# Altium PCB PCB_TX_V1.PcbDoc
Units mm, origin at the board's own origin, x right, y up, seen from the top; angles counter-clockwise.
Board outline 150 x 100 mm, 2 copper layers (Top Layer, Bottom Layer); 40 components, 27 nets, 154 pads, 34 vias.
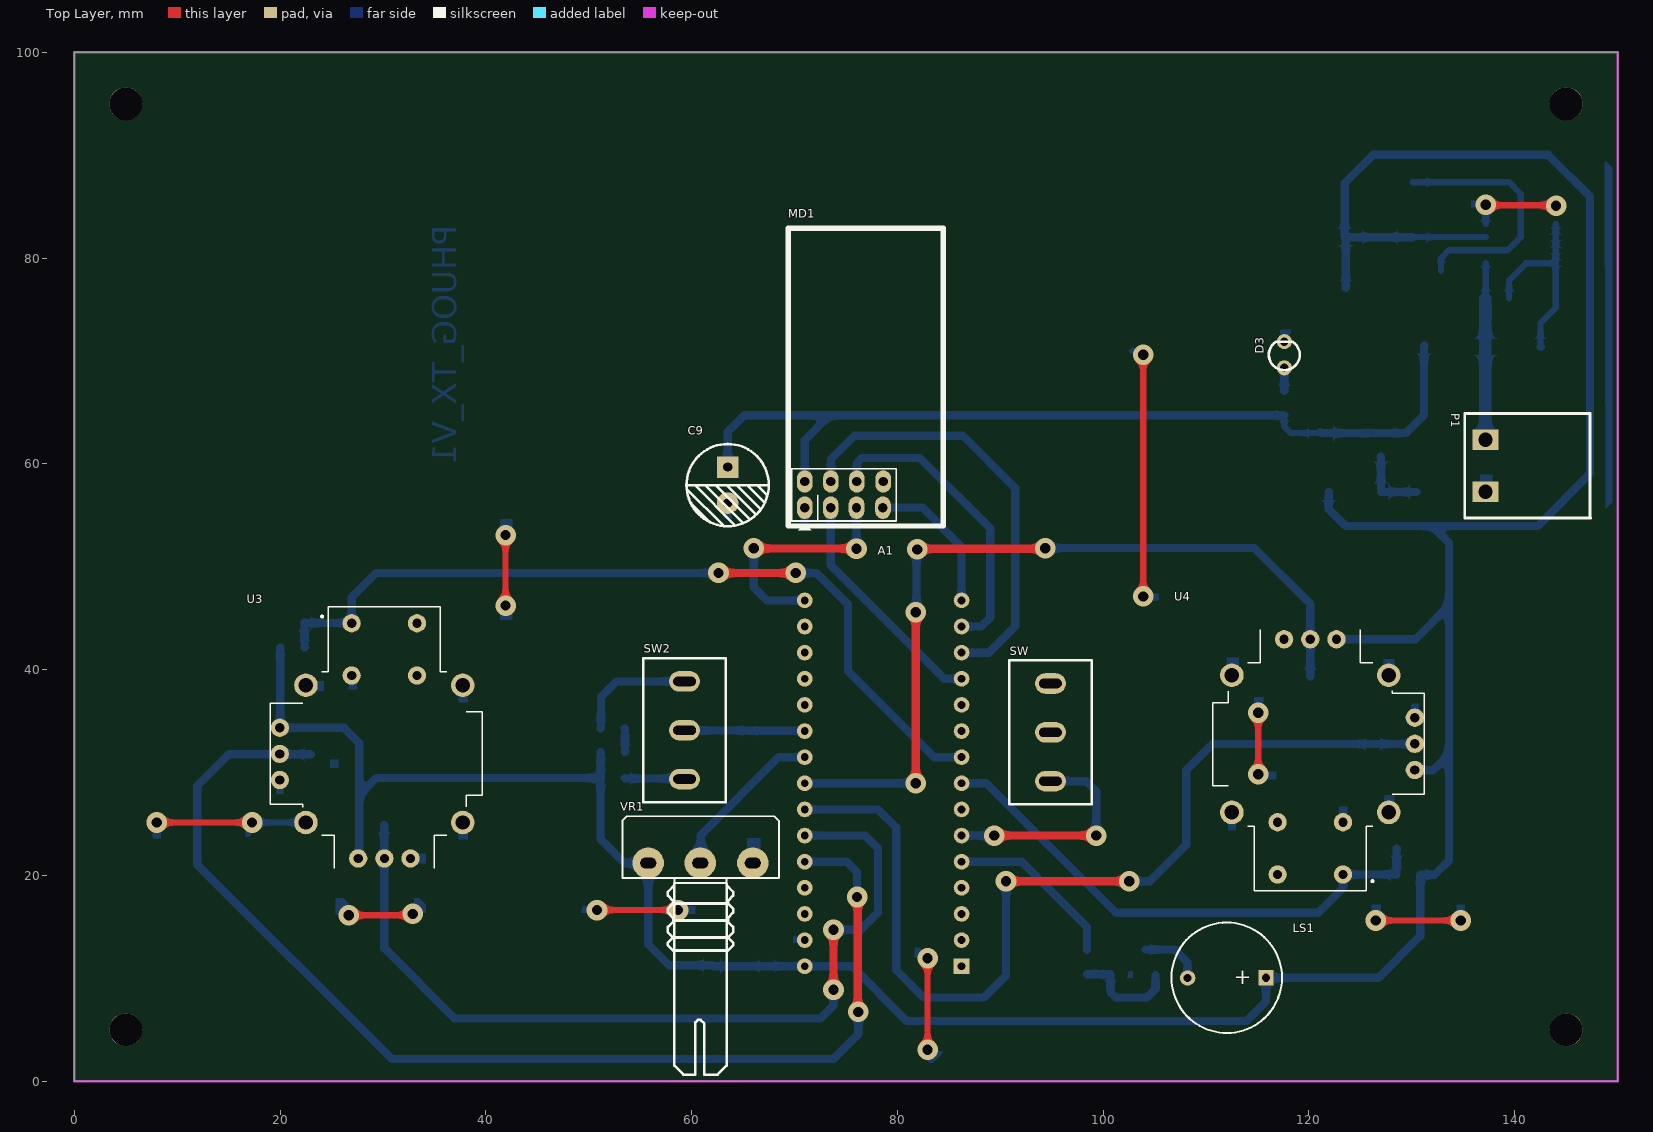
[diagram p0: Top Layer view]
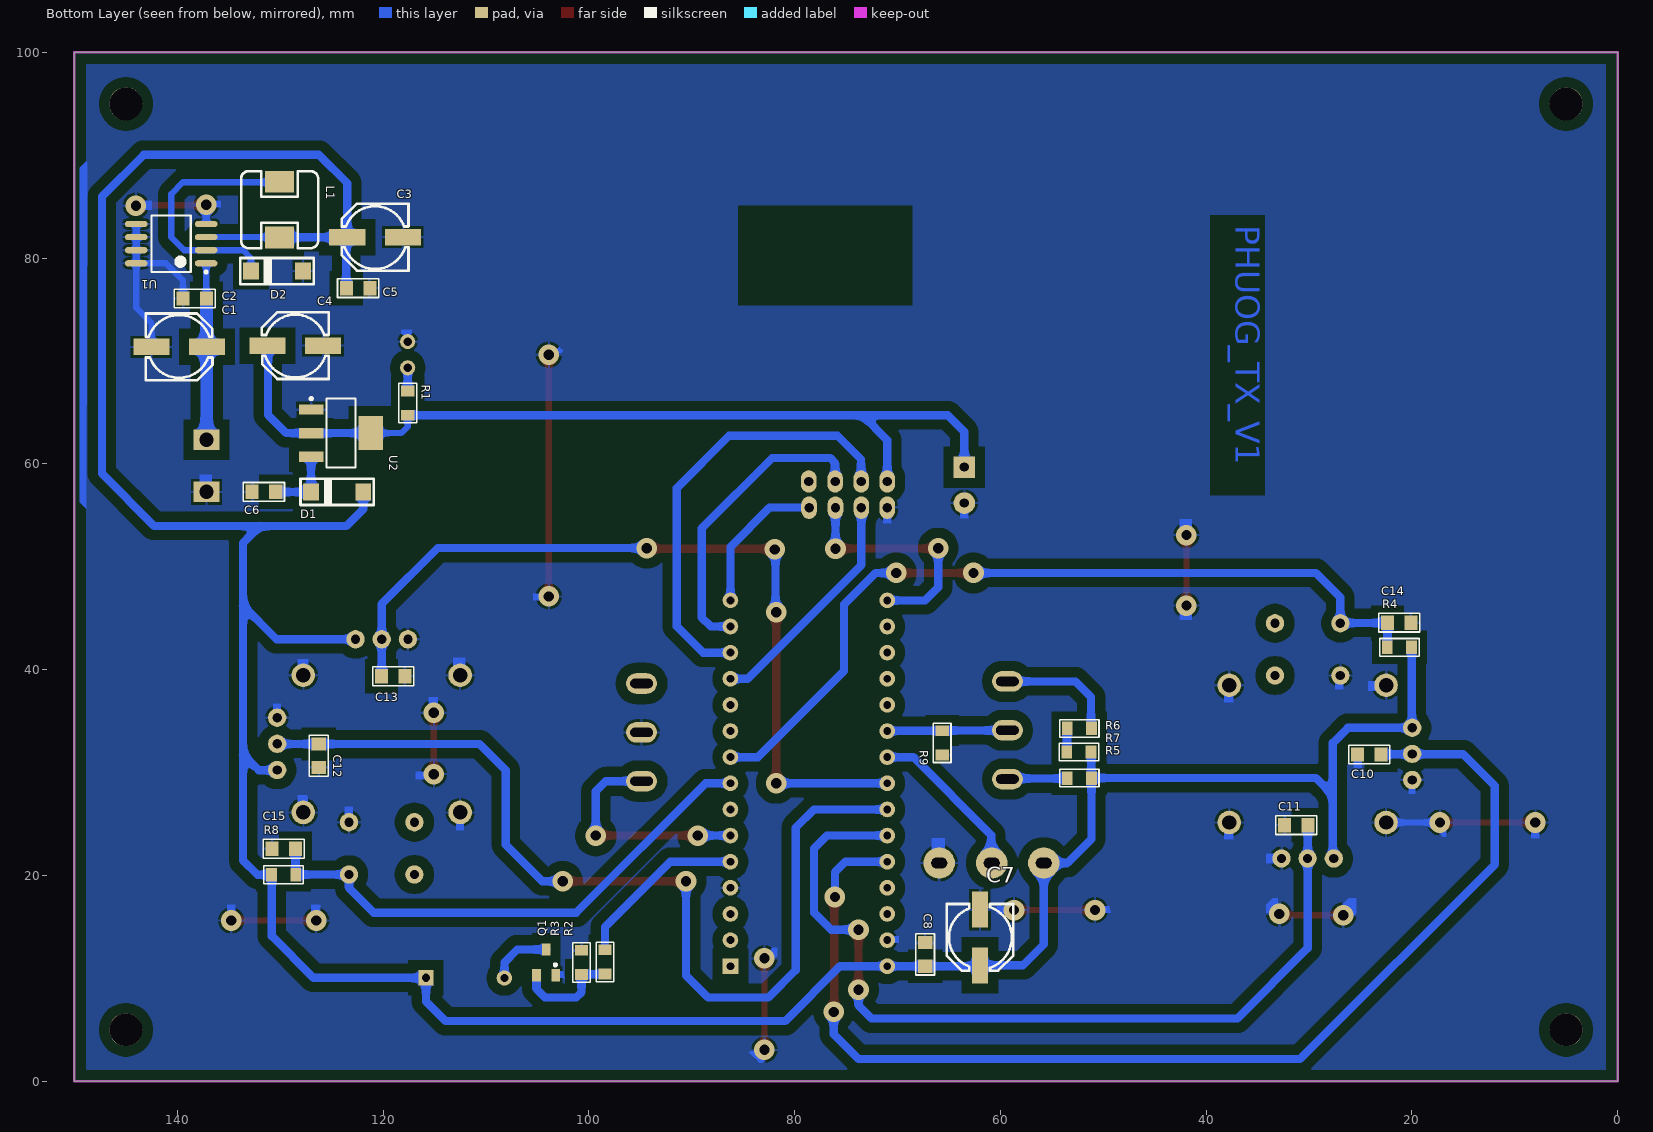
[diagram p1: Bottom Layer view, seen from below]

## Layer stack, top to bottom
Top Solder: solder mask 0.0102, Solder Resist, Dk 3.5
Top Layer: signal copper 0.0356
Dielectric 1: dielectric 0.32, FR-4, Dk 4.8
Bottom Layer: signal copper 0.0356
Bottom Solder: solder mask 0.0102, Solder Resist, Dk 3.5

## Board outline
0,0 150,0 150,100 0,100

## Design rules (kind name [scope] priority, off if disabled: settings)
Clearance [All] p1: gap=1 ignorepadtopadclearanceinfootprint=FALSE
PolygonConnect [All] p1: connectstyle=Relief reliefconductorwidth=0.254 reliefentries=4 polygonreliefangle="90 Angle" airgapwidth=0.254
RoutingVias [All] p1: holewidth=1 width=2 viastyle="Through Hole" minholewidth=1 minwidth=2 maxholewidth=1 maxwidth=2
SolderMaskExpansion [All] p1: expansion=0.102 istentingtop=FALSE
Width [All] p1: maxlimit=1.2 minlimit=0.6 preferedwidth=0.8
30 further rules are at their usual default settings.

## Components (designator, comment, footprint, x,y, rotation, side; value= is the part's Value field where it differs from the comment)
A1 "Nano" "Arduino nano" 87.757,7.112 r90 top
C1 "100uF/ 35V" "CAP SMD ALUMINUM D8" 139.827,71.374 r90 bottom
C2 "104" SM-0805 138.303,76.073 r180 bottom
C3 "16V/ 220uF" "CAP SMD ALUMINUM D8" 120.777,82.042 r270 bottom
C4 "16V/ 220uF" "CAP SMD ALUMINUM D8" 128.524,71.501 r270 bottom
C5 "104" SM-0805 122.428,77.089 r0 bottom
C6 "104" SM-0805 131.572,57.277 r180 bottom
C7 "16V/ 220uF" "CAP SMD ALUMINUM D8" 61.976,13.97 r180 bottom
C8 "104" SM-0805 67.31,12.319 r270 bottom
C9 "10uF" "tu hoa 8mm" 63.5,57.94 r270 top
C10 "104" SM-0805 24.13,31.75 r0 bottom
C11 "104" SM-0805 31.242,24.892 r0 bottom
C12 "104" SM-0805 126.238,31.623 r270 bottom
C13 "104" SM-0805 118.999,39.37 r180 bottom
C14 "104" SM-0805 21.209,44.577 r0 bottom
C15 "104" SM-0805 129.667,22.606 r180 bottom
D1 "M7" DO-214AC 124.46,57.277 r0 bottom
D2 "SS210" DO-214AC 130.302,78.74 r0 bottom
D3 "LED" "LED-3MM GRE" 117.602,70.612 r90 top value="LED 3 ly Single Colour"
L1 "100uH" "INDUCTOR SMD 7342 7.3X7.3X4.2mm" 130.048,84.709 r270 bottom value="150 mH"
LS1 "Coi Chip Speaker" "Coi Chip Speacker" 115.824,10.046 r180 top
MD1 "NRF24L01 Module" NRF24L01 70.993,55.753 r0 top
P1 "CON 2 EDG5.08" "CON 2 2EDG5.08" 137.16,62.357 r270 top
Q1 "C1815" SOT23B 104.14,11.557 r180 bottom
R1 "1k" "RESISTOR SMD 0805" 117.602,65.913 r90 bottom
R2 "1k" "RESISTOR SMD 0805" 98.425,11.591 r90 bottom
R3 "10k" "RESISTOR SMD 0805" 100.711,11.557 r90 bottom
R4 "10k" "RESISTOR SMD 0805" 21.209,42.164 r0 bottom
R5 "10k" "RESISTOR SMD 0805" 52.324,29.464 r180 bottom
R6 "3.3k" "RESISTOR SMD 0805" 52.324,34.29 r180 bottom
R7 "3.3k" "RESISTOR SMD 0805" 52.358,32.004 r0 bottom
R8 "10k" "RESISTOR SMD 0805" 129.667,20.066 r180 bottom
R9 "10k" "RESISTOR SMD 0805" 65.659,32.893 r90 bottom
SW "SW 3P" MTS-102 94.869,38.659 r270 top
SW2 "SW 3P" MTS-102 59.309,29.362 r90 top
U1 "XL1509" SOP8 140.589,81.407 r0 bottom
U2 "LM1117-3.3V" SOT223-4N 124.079,62.992 r180 bottom
U3 "JOYSTICK" XDCR_COM-09032 30.127,31.813 r0 top
U4 "JOYSTICK" XDCR_COM-09032 120.127,32.794 r180 top
VR1 "5K" "Bien Tro Volume Don" 55.778,21.209 r0 top

## Footprints (in the part's own frame and the unit in brackets; to place one, negate y for a bottom-side part, rotate by r counter-clockwise, add the part's x,y. Pads: shape width x height; smd on the part's side, far side on the other; paste and mask are expansions set on the pad)
"Arduino nano" [mil] "arduino nano"
  rect 60x60 hole 30: 0(160,60)
  round 60 hole 30: 1(260,60) 2(360,60) 3(460,60) 4(560,60) 5(660,60) 6(760,60) 7(860,60) 8(960,60) 9(1060,60) 10(1160,60) 11(1260,60) 12(1360,60) 13(1460,60) 14(1560,60) 15(1560,660) 16(1460,660) 17(1360,660) 18(1260,660) 19(1160,660) 20(1060,660) 21(960,660) 22(860,660) 23(760,660) 24(660,660) 25(560,660) 26(460,660) 27(360,660) 28(260,660) 29(160,660)
  body extent -25,10 1715,710, height 507
"Bien Tro Volume Don" [mil] "Volume control single"
  round 120 hole 40 slot 60 at 0 deg: 1(0,0) 2(199,0) 3(400,0)
  silkscreen extent -99,-810 500,179, body extent -110,-818 510,188, height 839
"CAP SMD ALUMINUM D8" [mm] "SMT Aluminum Electrolytic Capacitors, Dimensions 6.3x7.7(DxL)"
  rect 1.6x3.5 smd: 1(0,-2.7) 2(0,2.7)
  silkscreen extent -3.25,-3.25 3.25,3.25, body extent -3.34,-3.52 3.26,3.48, height 7.7
"Coi Chip Speacker" [mm]
  rect 1.5x1.5 hole 0.8: 1(0,0)
  round 1.5 hole 0.8: 2(7.62,0.013)
  silkscreen extent -1.55,-5.38 9.18,5.36, body extent -2.22,-6 13.24,6, height 4.5
"CON 2 2EDG5.08" [mm]
  rect 2x2.5 hole 1.4: 1(0,0) 2(5.08,0)
  silkscreen extent -2.54,-2.03 7.62,10.21, body extent -2.5,-1.75 7.58,10.25, height 3.15
DO-214AC [mm]
  rect 1.55x1.65 smd: 1(-2.54,0) 2(2.54,0)
  silkscreen extent -3.56,-1.27 3.56,1.27, body extent -2.59,-1.29 2.61,1.31, height 2.4
"INDUCTOR SMD 7342 7.3X7.3X4.2mm" [mm] "Inductor 7342 Body 7.3x7.3X4.2mm, Pad 2.8x2.1mm"
  rect 2.1x2.8 smd: 1(-2.7,0) 2(2.7,0)
  silkscreen extent -3.75,-3.75 3.75,3.75, body extent -3.65,-3.65 3.65,3.65, height 4.8
"LED-3MM GRE" [mm]
  round 1.47 hole 0.813: 1(-1.27,0) 2(1.27,0)
  silkscreen extent -1.5,-1.5 1.25,1.5, body extent -1.73,-1.65 1.49,1.65, height 4.72
MTS-102 [mm]
  oval 2x3 hole 0.9 slot 2.2 at 90 deg: 1(0,0) 2(4.75,0) 3(9.5,0)
  silkscreen extent -2.25,-4 11.75,4, body extent -1.85,-3.7 11.35,4.2, height 28.34
NRF24L01 [mil]
  oval 60x86 hole 36: 1(0,0) 2(0,100) 3(99,0) 4(100,100) 5(198,0) 6(199.5,100) 7(299,0) 8(300,100)
  silkscreen extent -63,-86 530,1069, body extent -73,-74 518,1068, height 588
"RESISTOR SMD 0805" [mm]
  rect 1.05x1.3 smd: 1(-1.177,0) 2(1.177,0)
  Top Layer pour cut-out: -0.584,0.864 0.584,0.864 0.584,-0.864 -0.584,-0.864
  silkscreen extent -1.92,-0.86 1.92,0.86, body extent -1,-0.62 1,0.63, height 0.5
SM-0805 [mil] "Compoment SMD 80x50mil"
  rect 50x55 smd: 1(-45,0) 2(45,0)
  Top Layer pour cut-out: -18,36 18,36 18,-36 -18,-36
  silkscreen extent -78,-36 78,36, body extent -40,-25 40,25, height 24
SOP8 [mm] "8-Pin Small Outline Package 1.27 mm Pitch, IPC Medium Density"
  oval 2.2x0.6 smd: 1(-3.4,1.905) 2(-3.4,0.635) 3(-3.4,-0.635) 4(-3.4,-1.905) 5(3.4,-1.905) 6(3.4,-0.635) 7(3.4,0.635) 8(3.4,1.905)
  silkscreen extent -3.52,-2.75 1.9,2.88, body extent -3.02,-2.51 3.02,2.51, height 1.6
SOT23B [mm] "SOT 23B"
  rect 0.85x1.2 smd: 1(0.94,-1.245) 2(0,1.25) 3(-0.95,-1.25)
  silkscreen extent 0.77,-0.38 1.02,-0.13, body extent -1.5,-1.3 1.5,1.2, height 1.06
SOT223-4N [mm] "SOT223, 4-Leads, Body 6.5x3.5mm, Pitch 2.3mm, Lead Span 7mm, IPC Medium Density"
  rect 2.4x1 smd: 1(-2.9,2.3) 2(-2.9,0) 3(-2.9,-2.3)
  rect 2.4x3.3 smd: 4(2.9,0)
  silkscreen extent -3.03,-3.35 1.4,3.47, body extent -3.39,-3.27 3.5,3.23, height 1.72
"tu hoa 8mm" [mm]
  rect 2.1x2.1 hole 0.9: 1(-1.75,0)
  round 2.1 hole 0.9: 2(1.75,0)
  silkscreen extent -4,-4 4,4, body extent -4.1,-4.07 4.1,4.13, height 13.81
XDCR_COM-09032 [mil]
  round 70 hole 35.43: B1A(-125,500) B1B(125,500) B2A(-125,300) B2B(125,300)
  round 70 hole 35: H1(-100,-400) H2(0,-400) H3(100,-400) V1(-400,100) V2(-400,0) V3(-400,-100)
  round 90 hole 55: S1(-300,262.5) S2(-300,-262.5) S3(300,-262.5) S4(300,262.5)
  silkscreen extent -437,-437 374,563, body extent -525,-524 525,563, height 1190

## Part data
A1: library part "Arduino Nano"
C1 C3 C4 C7: library part Cap_Polar
C2 C5 C6 C8 C10 C11 C12 C13 C14 C15: library part Cap_Non-Polar
C9: library part "Tu Hoa 100uF 35V 8x11", "Cắm", Chung_Loai=Cắm, Don_Vi=Con, Ma_Hang=MH002807, So_Chan=2, Ten_Linh_Kien="Tụ Hóa 100uF 35V 8x11MM"
D1: library part "Diode Standard", "Diode Standard", Part Number="LED 3 ly Single Colour"
D2: library part "Diode Schottky", "Diode Schottky", Part Number="LED 3 ly Single Colour"
D3: "LED Single"
L1: library part "Inductor Iron", "Magnetic-Core Inductor"
LS1: "Còi chip"
P1: "Cắm", Chung_Loai=Cắm, Don_Vi=Con, Ma_Hang=MH000759, Ten_Linh_Kien="CON 2 2EDG5.08-2P 5.08MM ( Xanh Cong)"
Q1: "NPN 600mW, ECB"
R1 R2 R3 R4 R5 R6 R7 R8 R9: library part Resistor
U1: "IC power sop8"
U2: library part LM1117, "800mA Low-Dropout Linear Regulator", Creator="Nguyen Ba Bien", Website=http://group3i.net
U3 U4: "Thumb Joystick", Package=None, Availability=Unavailable, MP=COM-09032, Price=None
VR1: library part "Triet Ap Don 5k", "Cắm", Chung_Loai=Cắm, Don_Vi=Con, Ma_Hang=MH001416, Ten_Linh_Kien="Triết Áp Đơn B5K"

## Free pads (board coordinates)
  round 3.2 hole 3.2: 2(5,5) 2(5,95) 2(145,5) 2(145,95)

## Via types
v1: diameter 2, hole 1, Top Layer to Bottom Layer, 34 vias

## Nets (pads, with @x,y where several pads share a name; then routed paths per layer and width w, separated by ;. In a path a pad name is that pad's centre, name@x,y a point inside that pad or via, vN(x,y) a via of type N, cw(c..) or ccw(c..) an arc to the next point about the centre after c; other vN are vias at no path point)
+3.3V: C4.1 C9.1 MD1.2 R1.1 U2.2 U2.4 | length 88.2
  Bottom Layer w0.6: R1.1 117.602,63.627 118.237,62.992 U2.4
  Bottom Layer w0.8: C9.1 63.5,63.119 65.117,64.736 73.406,64.736 ; MD1.2 70.993,62.323 73.406,64.736 ; R1.1 73.406,64.736 ; U2.4@121.086,63.085 U2.4 U2.2 129.413,62.992 131.191,64.77 131.191,71.468 C4.1
+5V: A1.29 C3.1 C5.2 C7.1 C8.2 D1.1 L1.2 LS1.1 R4.1 R5.2 R7.1 R8.1 U1.3 U3.H1 U3.V1 U4.H1 U4.V1 VR1.1 | length 322.6
  Bottom Layer w0.6: L1.2 130.081,82.042 U1.3
  Bottom Layer w0.8: R4.1 19.999,42.132 19.999,34.386 U3.V1 26.226,34.353 27.686,32.893 27.686,27.813 ; U3.H1 27.686,21.752 27.686,27.813 ; R7.1 51.164,31.987 51.164,29.481 R5.2 ; D1.1 121.92,55.626 123.571,53.975 131.953,53.975 ; U4.H1 130.33,42.954 133.604,46.228 ; C5.2 123.571,81.948 C3.1@123.493,82.026 ; L1.2 130.032,82.026 C3.1@123.493,82.026 ; U4.V1 130.315,30.226 132.08,30.226 133.604,31.75 ; 27.686,27.813 29.337,29.464 R5.2 ; R5.2 51.147,23.529 53.467,21.209 VR1.1 55.778,13.31 57.818,11.27 C7.1 62.07,11.176 C8.2 A1.29 75.565,11.176 80.899,5.842 113.919,5.842 115.824,7.747 LS1.1 126.759,10.046 130.81,14.097 130.81,20.032 R8.1 132.207,20.066 133.604,21.463 133.604,31.75 ; C3.1@123.493,82.026 C3.1 123.477,87.282 126.238,90.043 143.256,90.043 147.32,85.979 147.32,59.055 142.24,53.975 131.953,53.975 ; 131.953,53.975 133.604,52.324 133.604,46.228 ; 133.604,31.75 133.604,46.228
+12V: C1.1 C2.2 P1.1 U1.1 | length 17.2
  Bottom Layer w0.6: C2.2 137.175,76.088 137.175,79.502 U1.1
  Bottom Layer w1.2: P1.1 137.144,62.373 137.144,71.358 C1.1 137.144,71.39 137.144,76.057 C2.2
BUZZ: A1.4 R2.2 | length 17
  Bottom Layer w0.8: A1.4 92.075,21.336 98.425,14.986 R2.2
CE: A1.11 MD1.3 | length 22.9
  Bottom Layer w0.8: MD1.3 73.508,50.19 84.582,39.116 A1.11
CONF: A1.5 SW.3 | length 22.2
  Top Layer w0.8: v1(89.408,23.876) v1(99.314,23.876)
  Bottom Layer w0.8: A1.5 v1(89.408,23.876) ; SW.3 98.349,29.159 99.314,28.194 v1(99.314,23.876)
CSN: A1.12 MD1.4 | length 42.8
  Bottom Layer w0.8: MD1.4 73.533,60.452 75.819,62.738 86.36,62.738 91.44,57.658 91.44,44.196 88.9,41.656 A1.12
GND: A1.3 A1.28 C1.2 C2.1 C3.2 C4.2 C5.1 C6.1 C7.2 C8.1 C9.2 C10.2 C11.2 C12.2 C13.2 C14.1 C15.1 D2.1 D3.2 MD1.1 P1.2 Q1.1 R3.2 R9.1 SW.2 U1.4 U1.5 U1.6 U1.7 U1.8 U2.1 U3.B2A U3.H3 U3.S1 U3.S2 U3.S3 U3.S4 U3.V3 U4.B2A U4.H3 U4.S1 U4.S2 U4.S3 U4.S4 U4.V3 VR1.3 | length 110.9
  Top Layer w0.6: v1(8.001,25.146) v1(17.272,25.146) ; v1(26.67,16.129) 32.766,16.129 v1(32.893,16.256) ; v1(41.91,46.228) v1(41.91,53.086) ; v1(50.8,16.637) v1(58.674,16.637) ; v1(82.931,3.048) v1(82.931,11.938) ; v1(103.886,47.117) v1(103.886,70.612) ; v1(115.062,29.845) v1(115.062,35.814) ; v1(126.492,15.621) v1(134.747,15.621) ; v1(137.189,85.188) 137.238,85.139 143.969,85.139 v1(144.018,85.09)
  Bottom Layer w0.6: v1(17.272,25.146) U3.S2 ; v1(32.893,16.256) v1@33.147,16.256 ; U1.4 v1(137.189,85.188) ; C2.1 139.446,77.851 141.097,79.502 U1.8 ; C1.2@142.494,71.407 142.494,73.66 143.989,75.155 U1.8 ; U1.5 U1.6 U1.7 U1.8
  Bottom Layer w0.8: MD1.1@70.854,55.614 MD1.1 ; C1.2@142.494,71.407 C1.2
JOY_SEL1: A1.7 C15.2 R8.2 U4.B1A | length 52.3
  Bottom Layer w0.8: A1.7 88.646,28.956 101.219,16.383 120.904,16.383 123.302,18.781 U4.B1A 123.316,20.08 128.476,20.08 R8.2 128.507,20.083 128.507,22.589 C15.2
JOY_SEL2: A1.8 C14.2 R4.2 U3.B1A | length 81
  Top Layer w0.8: v1(62.611,49.403) v1(70.104,49.403)
  Bottom Layer w0.8: C14.2 C14.2@22.369,44.56 ; R4.2 22.369,42.181 C14.2@22.369,44.56 ; v1(62.611,49.403) 29.337,49.403 26.952,47.018 U3.B1A 26.92,44.545 22.384,44.545 C14.2@22.369,44.56 ; v1(70.104,49.403) 72.136,49.403 75.184,46.355 75.184,39.878 83.566,31.496 A1.8
JOY_X1: A1.22 C13.1 U4.H2 | length 81.1
  Top Layer w0.8: v1(81.788,28.956) v1(81.788,45.593) ; v1(81.915,51.689) 81.978,51.752 94.297,51.752 v1(94.361,51.816)
  Bottom Layer w0.8: A1.22 v1(81.788,28.956) ; v1(81.788,45.593) 81.852,45.657 81.852,51.625 v1(81.915,51.689) ; v1(94.361,51.816) 114.681,51.816 120.127,46.37 U4.H2 120.134,42.947 120.134,39.378 C13.1
JOY_X2: A1.24 C11.1 U3.H2 | length 85.2
  Top Layer w0.8: v1(73.787,8.89) v1(73.787,14.732)
  Bottom Layer w0.8: C11.1 30.113,24.878 30.113,21.668 U3.H2 30.127,12.926 36.957,6.096 72.517,6.096 73.787,7.366 v1(73.787,8.89) ; A1.24 76.835,23.876 78.105,22.606 78.105,16.383 76.454,14.732 v1(73.787,14.732)
JOY_Y1: A1.23 C12.1 U4.V2 | length 94.8
  Top Layer w0.8: v1(90.551,19.431) v1(102.536,19.431)
  Bottom Layer w0.8: A1.23 78.105,26.416 79.883,24.638 79.883,14.732 79.883,10.795 82.55,8.128 88.392,8.128 90.551,10.287 v1(90.551,19.431) ; v1(102.536,19.431) 104.521,19.431 108.077,22.987 108.077,30.226 110.617,32.766 C12.1 126.252,32.78 130.273,32.78 U4.V2
JOY_Y2: A1.25 C10.1 U3.V2 | length 114.4
  Top Layer w0.8: v1(76.073,17.907) 76.136,17.843 76.136,6.794 v1(76.2,6.731)
  Bottom Layer w0.8: U3.V2 U3.V2@19.999,31.782 ; C10.1 22.955,31.782 U3.V2@19.999,31.782 ; A1.25 75.057,21.336 76.073,20.32 v1(76.073,17.907) ; v1(76.2,6.731) 76.2,4.572 73.787,2.159 30.861,2.159 11.938,21.082 11.938,28.702 15.018,31.782 U3.V2@19.999,31.782
MISO: A1.14 MD1.7 | length 14.4
  Bottom Layer w0.8: MD1.7 82.423,55.753 86.233,51.943 A1.14
MODE: A1.20 R9.2 SW2.2 | length 11.7
  Bottom Layer w0.8: SW2.2 59.33,34.091 65.638,34.091 R9.2 65.676,34.053 70.976,34.053 A1.20
MOSI: A1.13 MD1.6 | length 29.6
  Bottom Layer w0.8: MD1.6 76.06,60.11 76.529,60.579 82.169,60.579 89.027,53.721 89.027,45.085 88.138,44.196 A1.13
NetC6_2: C6.2 D1.2 U2.3 | length 6.9
  Bottom Layer w0.8: U2.3 126.989,60.681 126.989,57.288 D1.2 C6.2
NetD2_2: D2.2 L1.1 U1.2 | length 25.1
  Bottom Layer w0.6: L1.1 130.081,87.376 139.446,87.376 140.589,86.233 140.589,82.042 139.319,80.772 U1.2 133.604,80.772 132.842,80.01 D2.2
NetD3_1: D3.1 R1.2 | length 2.3
  Bottom Layer w0.8: R1.2 D3.1
NetLS1_2: LS1.2 Q1.2 | length 6.1
  Bottom Layer w0.8: Q1.2 106.954,12.807 108.204,11.557 LS1.2
NetQ1_3: Q1.3 R2.1 R3.1 | length 10.3
  Bottom Layer w0.8: R2.1 98.442,10.397 100.694,10.397 R3.1 100.711,8.636 101.219,8.128 104.267,8.128 105.09,8.951 Q1.3
NetR5_1: R5.1 SW2.1 | length 5.8
  Bottom Layer w0.8: R5.1 53.552,29.413 59.258,29.413 SW2.1
NetR6_1: R6.1 R7.2 | length 2.3
  Bottom Layer w0.8: R6.1 53.518,34.273 53.518,32.021 R7.2
NetR6_2: R6.2 SW2.3 | length 11.8
  Bottom Layer w0.8: R6.2 51.181,34.324 51.181,37.338 52.705,38.862 SW2.3
SCK: A1.15 MD1.5 | length 23.3
  Top Layer w0.8: v1(66.04,51.816) 66.078,51.778 75.984,51.778 v1(76.022,51.74)
  Bottom Layer w0.8: v1(66.04,51.816) 66.04,48.006 67.31,46.736 A1.15 ; v1(76.022,51.74) MD1.5
VR: A1.21 VR1.2 | length 16
  Bottom Layer w0.8: VR1.2 60.89,21.266 60.89,23.933 68.453,31.496 A1.21
pads on no net: A1.0 A1.1 A1.2 A1.6 A1.9 A1.10 A1.16 A1.17 A1.18 A1.19 A1.26 A1.27 MD1.8 SW.1 U3.B1B U3.B2B U4.B1B U4.B2B

## Polygon pours and split planes (outlines as drawn)
GND on Bottom Layer "GND_L02_P000" (solid, remove dead copper, pour order 0): 0,99.949 149.987,99.949 149.987,0 0,0

## Keep-outs
Keep-Out Layer:
  the board outline again, w0.254

## Other copper
Bottom Layer:
  region net GND: 70.612,54.229 70.612,54.991 71.374,54.991 71.374,54.229
  region net GND: 63.119,54.737 63.119,55.499 63.881,55.499 63.881,54.737
  region net GND: 24.892,31.242 25.654,31.242 25.654,30.48 24.892,30.48
  region net GND: 69.85,14.097 70.485,14.097 70.485,13.462 69.85,13.462
  region net GND: 102.489,10.668 102.87,10.668 102.87,10.033 102.494,10.033 102.361,9.9
  region net GND: 112.141,25.146 112.141,24.384 112.903,24.384 112.903,25.146
  region net GND: 122.936,26.67 123.698,26.67 123.698,25.781 122.936,25.781
  region net GND: 127.381,27.813 128.27,27.813 128.27,26.924 127.254,26.924
  region net GND: 129.921,36.703 130.683,36.703 130.683,35.941 129.921,35.941
  region net GND: 142.494,85.598 143.256,85.598 143.256,84.709 142.494,84.709
  region net GND: 135.763,85.598 136.398,85.598 136.398,84.963 135.763,84.963
  region net GND: 136.652,58.166 136.652,58.928 137.795,58.928 137.795,58.166
  region net GND: 104.648,47.371 105.41,47.371 105.41,46.736 104.648,46.736
  region net GND: 41.402,44.831 41.402,45.593 42.545,45.593 42.545,44.831
  region net GND: 41.402,54.61 42.545,54.61 42.545,53.721 41.402,53.721
  region net GND: 127.254,41.021 128.27,41.021 128.27,40.259 127.254,40.259
  region net GND: 112.014,41.148 113.157,41.148 113.157,40.259 112.014,40.259
  region net GND: 114.681,37.338 115.57,37.338 115.57,36.576 114.681,36.576
  region net GND: 115.824,30.099 116.84,30.099 116.84,29.337 115.824,29.337
  region net GND: 134.366,17.145 135.128,17.145 135.128,16.383 134.366,16.383
  region net GND: 126.111,17.145 127,17.145 127,16.256 126.111,16.256
  region net GND: 65.405,22.352 65.405,23.622 66.675,23.622 66.675,22.098
  region net GND: 59.436,17.018 60.325,17.018 60.325,16.256 59.436,16.256
  region net GND: 49.403,17.018 50.038,17.018 50.038,16.383 49.276,16.383
  region net GND: 34.163,21.209 33.274,21.209 33.274,22.098 34.163,22.098
  region net GND: 37.338,23.495 37.338,24.257 38.227,24.257 38.227,23.495
  region net GND: 19.685,27.94 19.685,28.702 20.32,28.702 20.32,27.94
  region net GND: 37.338,36.83 37.338,37.592 38.227,37.592 38.227,36.83
  region net GND: 26.67,38.735 26.67,38.1 27.432,38.1 27.432,38.735
  region net GND: 23.368,37.973 23.368,38.862 24.257,38.862 24.257,37.973
  region net GND: 7.62,23.622 7.62,24.384 8.382,24.384 8.382,23.622
  region net GND: 17.145,23.892 17.002,23.749 16.637,23.749 16.637,24.384 17.272,24.384
  region net GND: 33.02,17.145 33.02,17.78 33.528,17.78 34.163,17.145 34.163,16.399 34.147,16.383 33.782,16.383
  region net GND: 25.416,16.256 25.4,16.272 25.4,17.78 26.146,17.78 26.67,17.256 26.67,17.145 25.654,16.129
  region net GND: 83.058,1.794 83.455,1.794 84.455,2.794 84.328,2.921 83.82,2.921 82.931,2.032
  region net GND: 81.677,12.065 81.661,12.081 81.661,12.954 82.169,12.954 82.423,12.7 82.042,12.319 82.042,12.065
  region net GND: 149.479,85.979 149.479,88.773 148.844,89.408 148.732,89.296 148.732,85.979
  region net GND: 149.479,58.928 149.479,56.261 148.844,55.626 148.844,58.928
  region net GND: 148.732,85.979 149.479,85.979 149.479,58.928 148.844,58.928
  region net GND: 117.22,72.645 117.348,72.517 118.053,72.517 118.237,72.701 118.237,73.025 117.221,73.025 117.22,73.024
  region net GND: 102.632,70.739 102.997,70.739 103.124,70.866 103.124,71.141 102.883,71.382 102.621,71.12 102.489,71.12
  pour cut-out: 68.58,85.09 85.471,85.09 85.471,75.438 68.58,75.438
  pour cut-out: 125.984,88.9 134.112,88.9 134.112,80.645 125.984,80.645
  text "PHUOG_TX_V1" at 37.901,83.185 h4 r90

## Text inside footprints (layer, text, board x,y; h text height)
LS1: Top Overlay "+" at 114.414,10.757 h1.52 r180